# Altium PCB Miner-8Chips.PcbDoc (part 1 of 2)
Units mm, origin at the board's own origin, x right, y up, seen from the top; angles counter-clockwise.
Board outline 80.01 x 98.03 mm, 2 copper layers (Top Layer, Bottom Layer), stack 1.061 mm thick; 329 components, 236 nets, 967 pads, 0 vias.
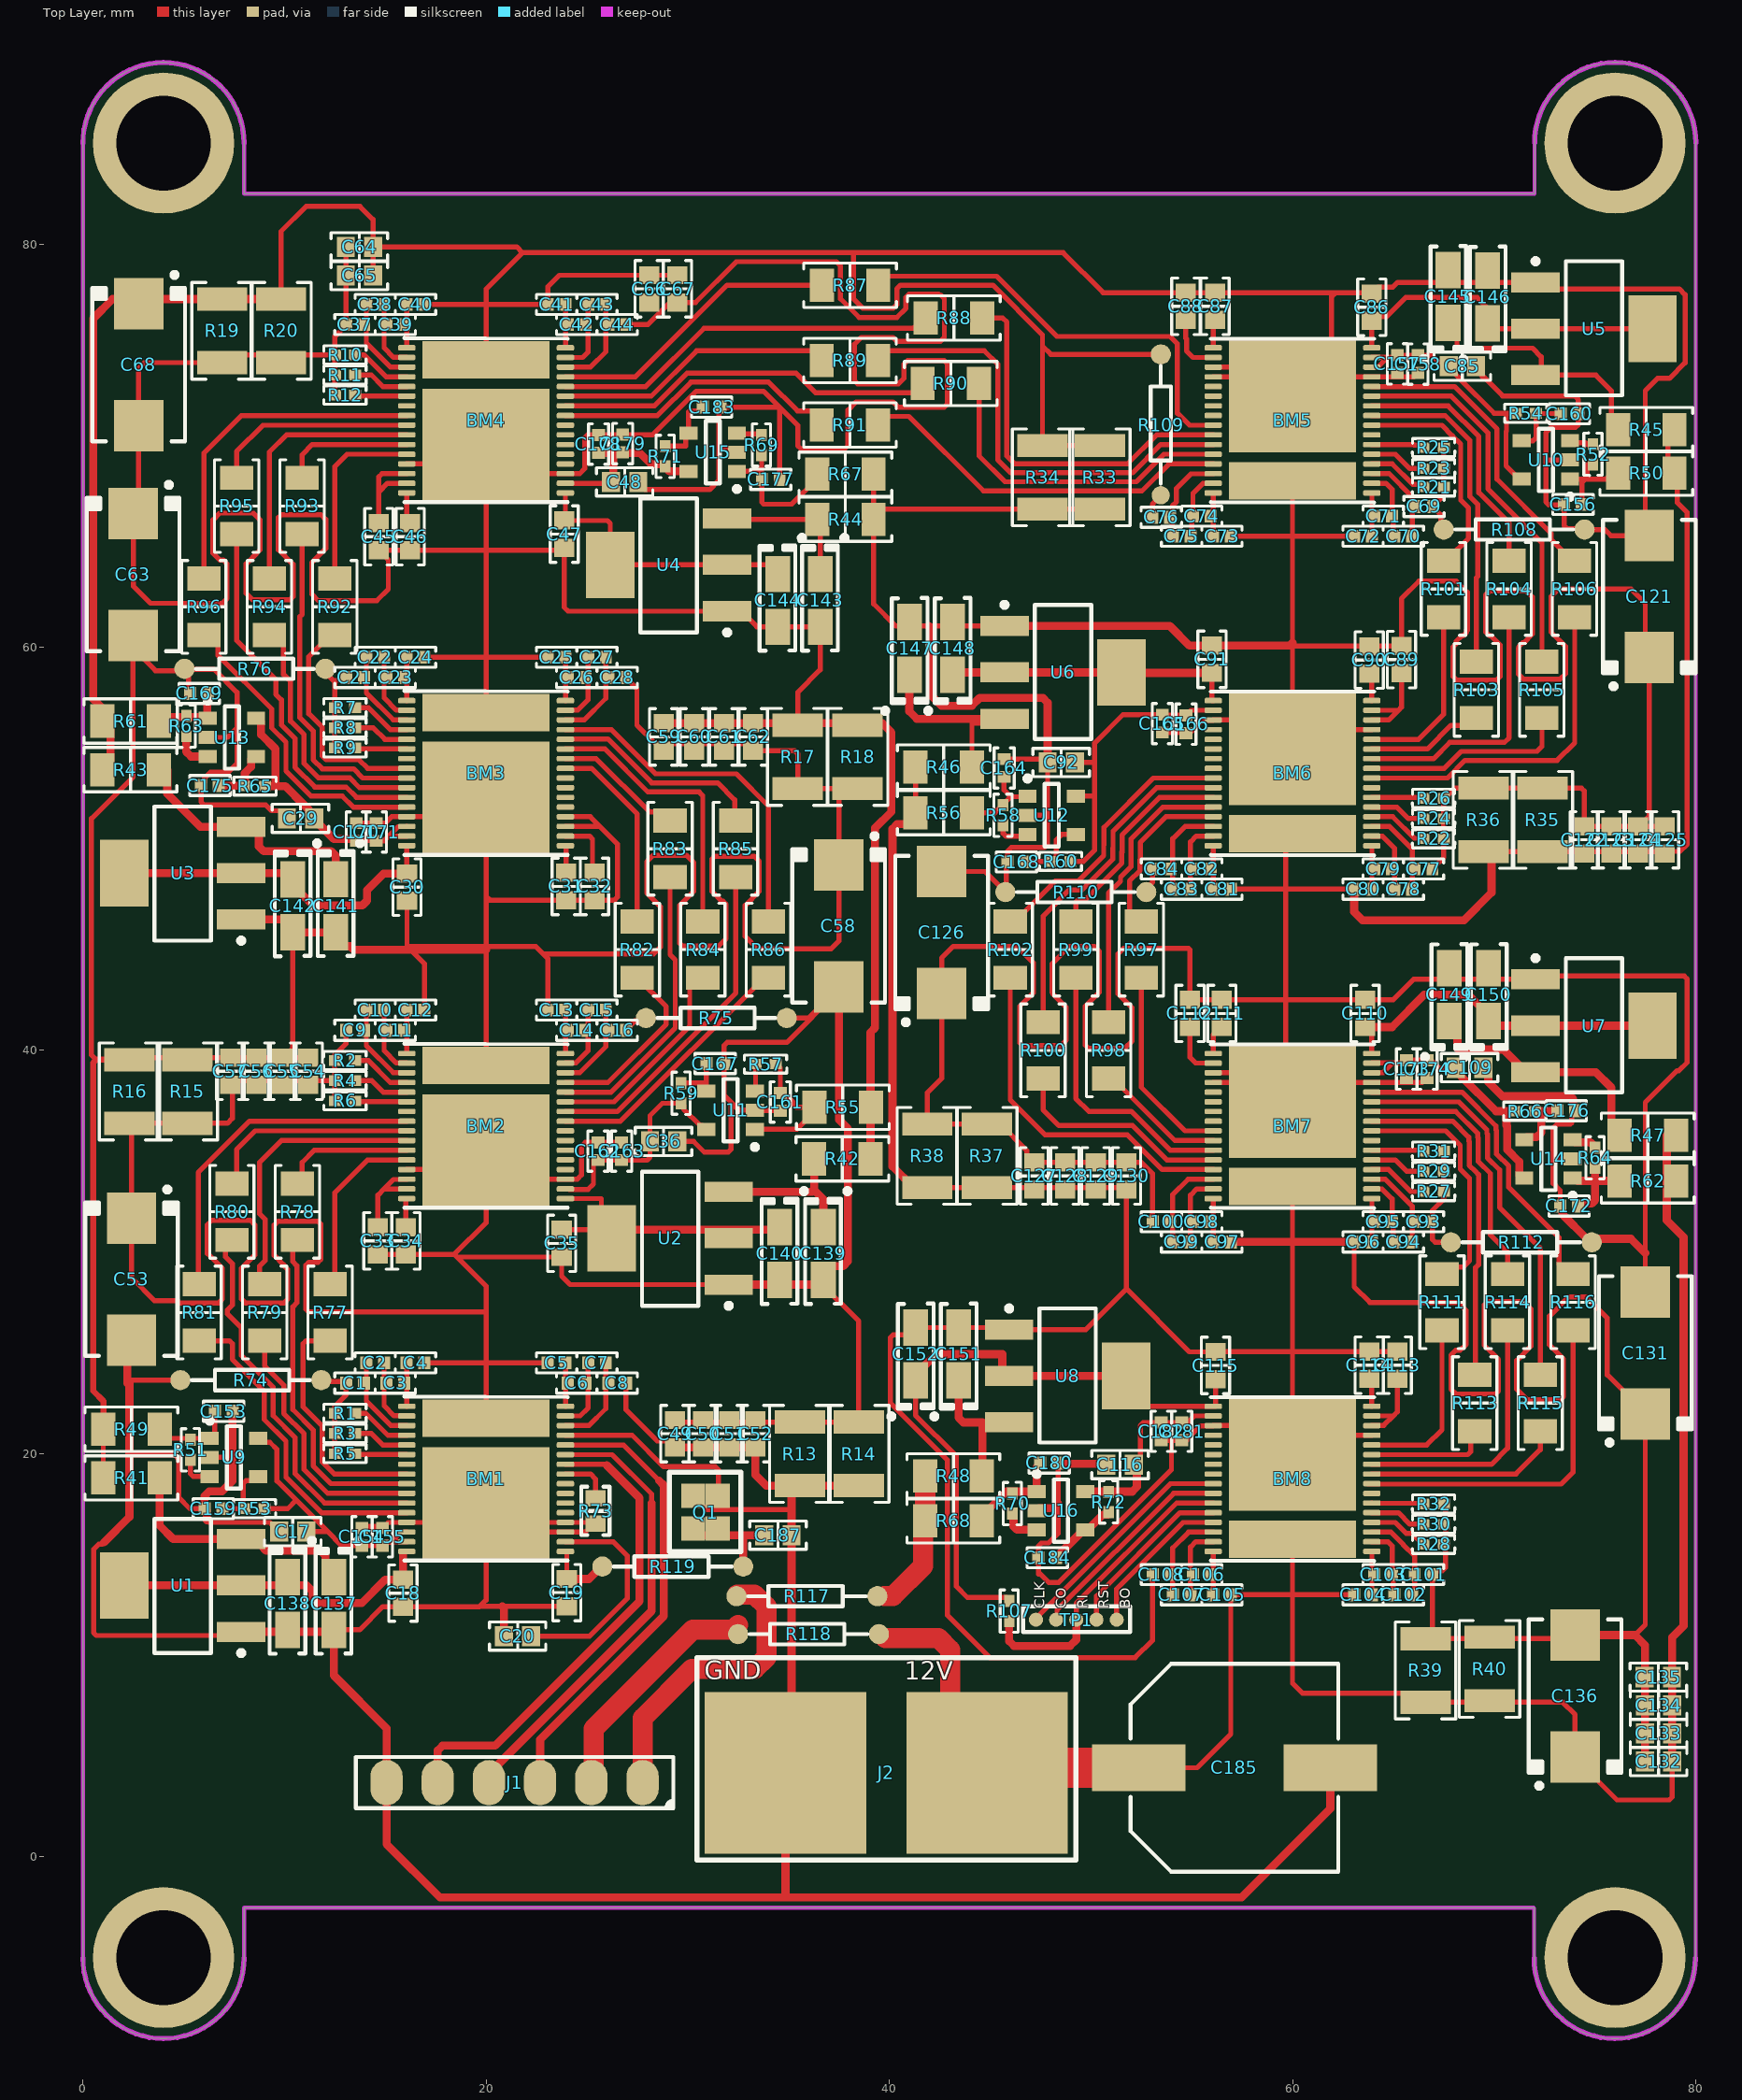
[diagram p0: Top Layer view]
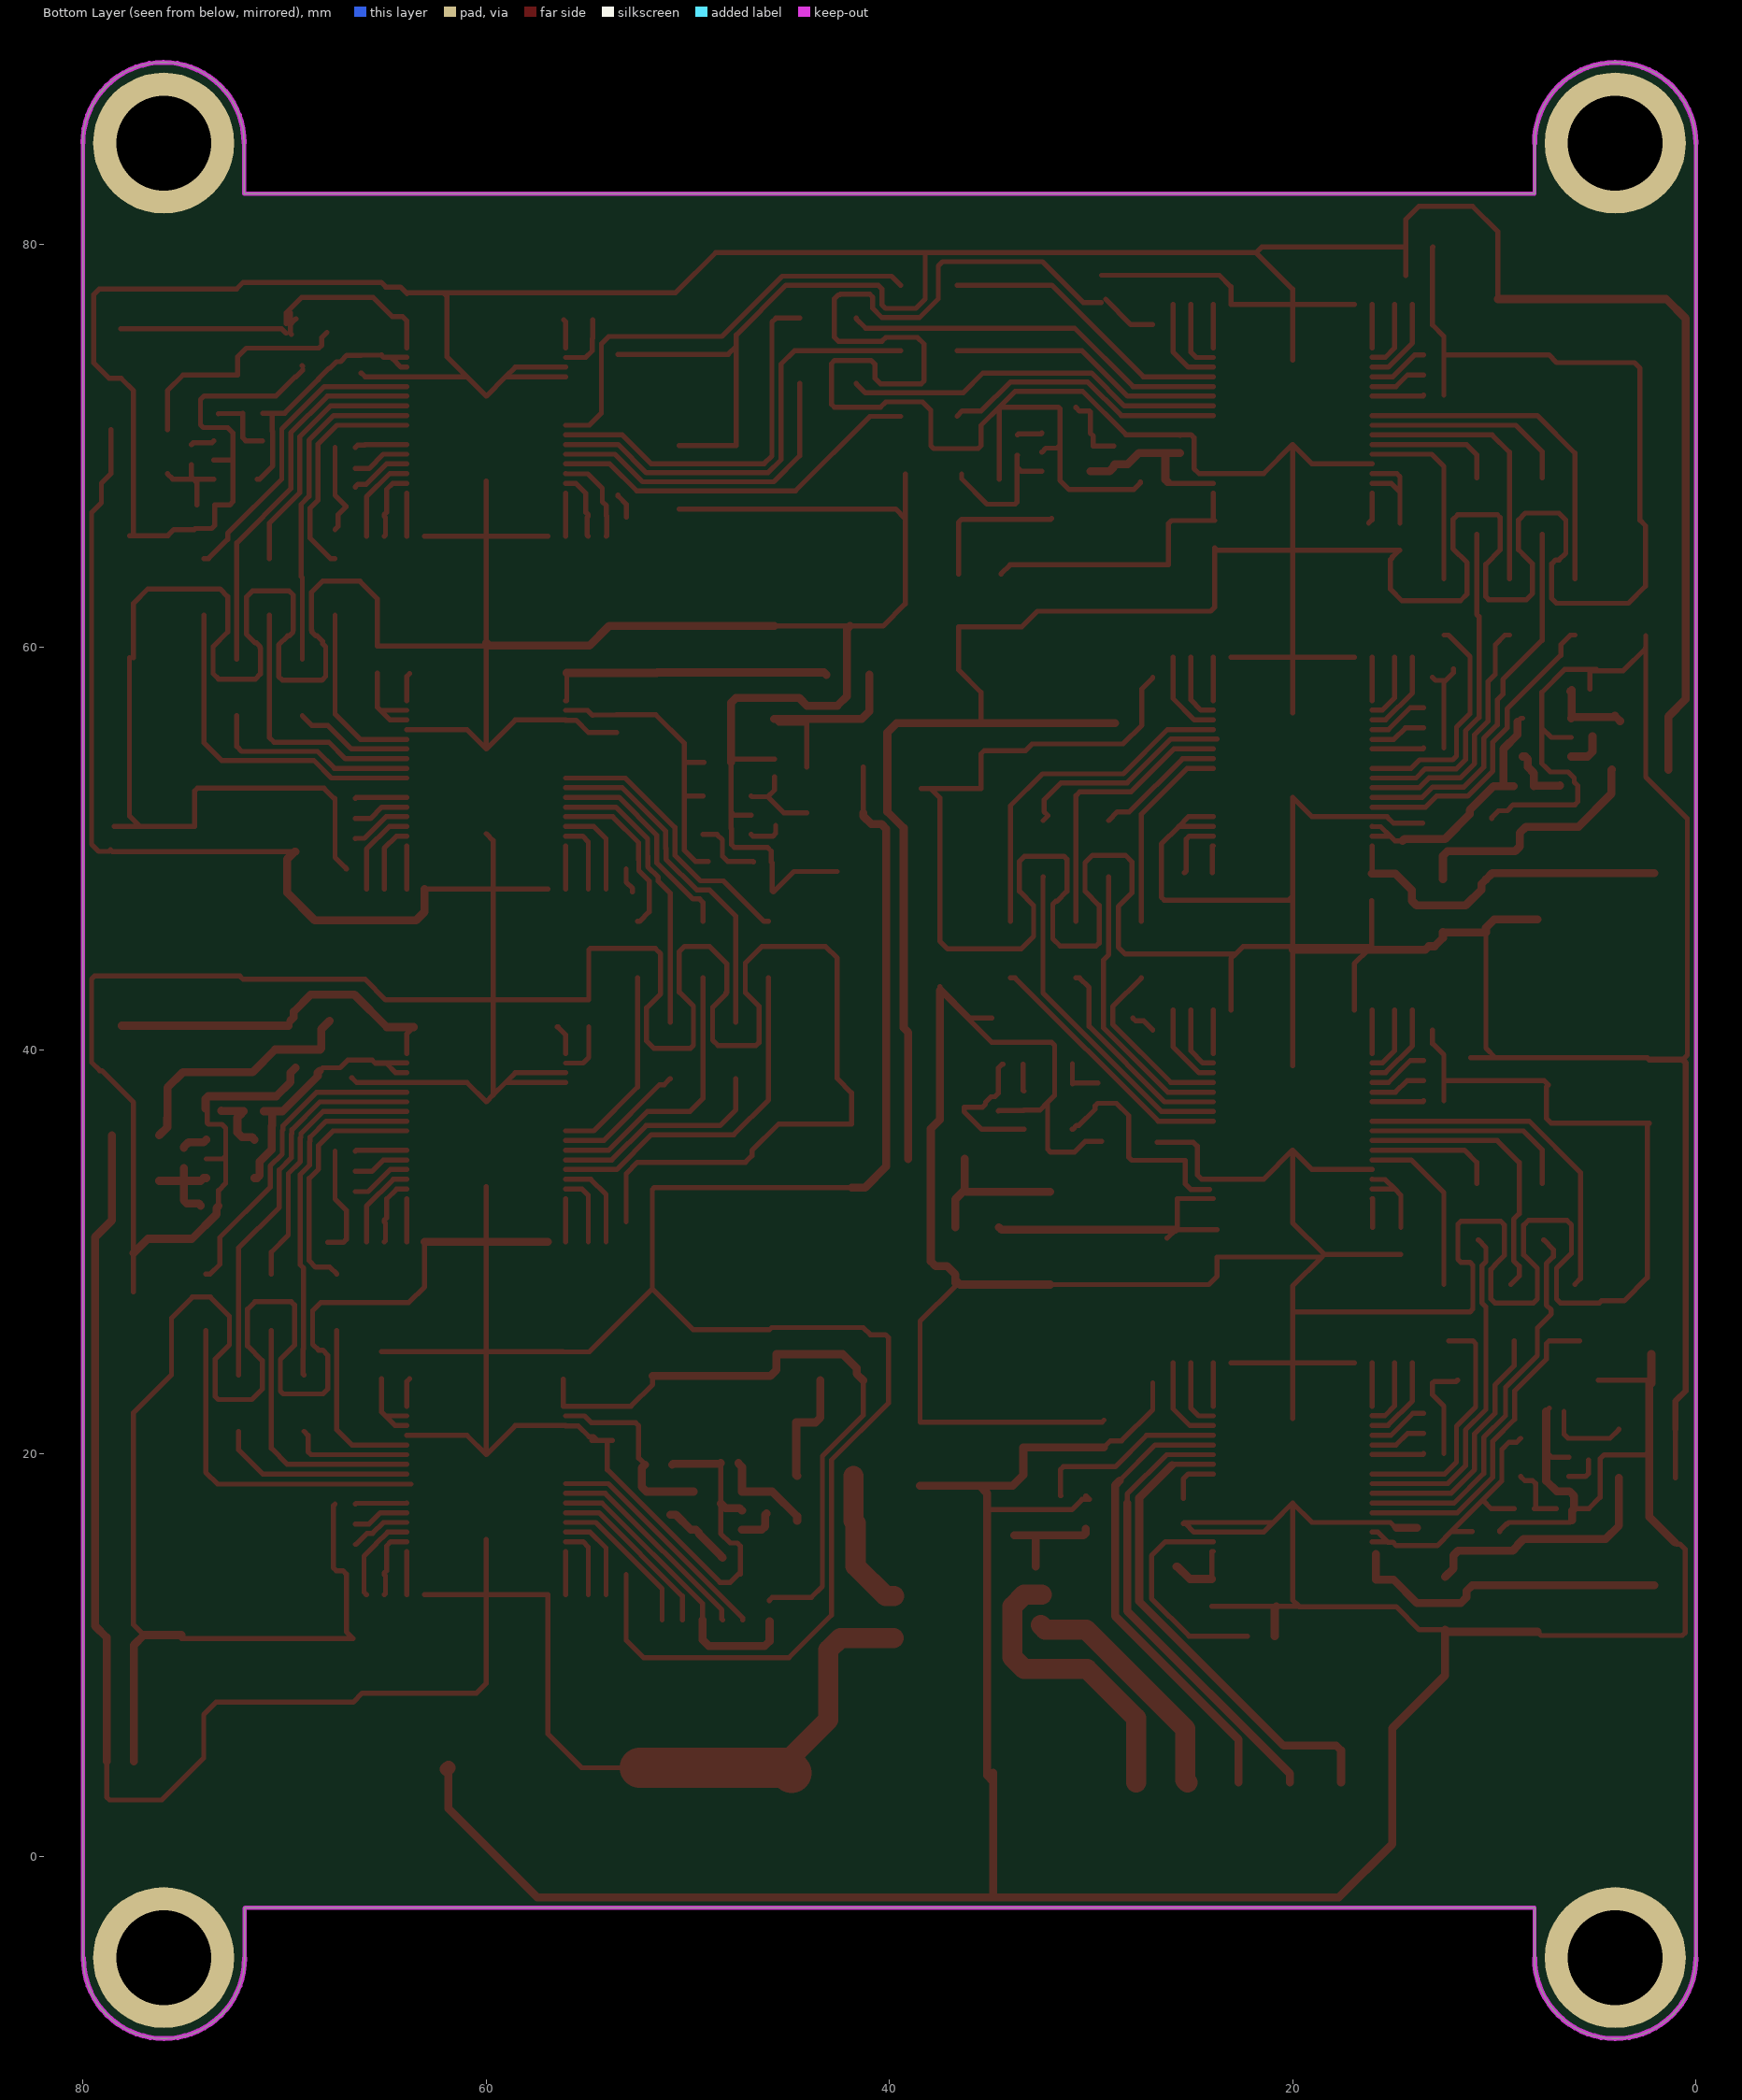
[diagram p1: Bottom Layer view, seen from below]

## Layer stack, top to bottom
Top Solder: solder mask 0.0102, Solder Resist, Dk 3.5
Top Layer: signal copper 0.0356
Dielectric 1: dielectric 0.99, FR-4, Dk 4.8
Bottom Layer: signal copper 0.0356
Bottom Solder: solder mask 0.0102, Solder Resist, Dk 3.5

## Board outline
0,-5 0,85 cw(c4,85) 8,85 8,82.5 72.009,82.5 72.009,85.01 cw(c76.009,85.01) 80.009,85.01 80,85 80,-5 79.985,-5.015 cw(c75.985,-5.015) 71.985,-5.015 71.985,-2.54 71.96,-2.515 8,-2.515 8,-5.015 cw(c4,-5.015)

## Design rules (kind name [scope] priority, off if disabled: settings)
Clearance [All] p1: gap=0.2 ignorepadtopadclearanceinfootprint=FALSE
PolygonConnect [All] p1: connectstyle=Relief reliefconductorwidth=0.254 reliefentries=4 polygonreliefangle="90 Angle" airgapwidth=0.254
RoomDefinition POWER [InComponentClass('POWER')] p1: confinementstyle=ConfineOut formatcopy=TRUE lockcomponents=FALSE outline 136.271,224.155 774.954,224.155 774.954,235.839 136.271,235.839
RoomDefinition BLOCK[5-8] [InComponentClass('BLOCK[5-8]')] p2: confinementstyle=ConfineOut formatcopy=TRUE lockcomponents=FALSE outline 135.255,204.089 735.076,204.089 735.076,216.408 135.255,216.408
RoomDefinition BLOCK[1-4] [InComponentClass('BLOCK[1-4]')] p3: confinementstyle=ConfineOut formatcopy=TRUE lockcomponents=FALSE outline 132.461,186.944 657.606,186.944 657.606,199.263 132.461,199.263
RoutingVias [All] p1: holewidth=0.711 width=1.27 viastyle="Through Hole" minholewidth=0.711 minwidth=1.27 maxholewidth=0.711 maxwidth=1.27
SolderMaskExpansion [All] p1: expansion=0.102 istentingtop=FALSE
Width [All] p1: maxlimit=2 minlimit=0.25 preferedwidth=0.4
30 further rules are at their usual default settings.

## Classes and differential pairs
component class POWER: C137 C138 C139 C140 C141 C142 C143 C144 C145 C146 C147 C148 C149 C150 C151 C152 C153 C154 C155 C156 C157 C158 C159 C160 C161 C162 C163 C164 C165 C166 C167 C168 C169 C170 C171 C172 C173 C174 C175 C176 C177 C178 C179 C180 C181 C182 C183 C184 C185 C187 J1 J2 Q1 R41 R42 R43 R44 R45 R46 R47 R48 R49 R50 R51 R52 R53 R54 R55 R56 R57 R58 R59 R60 R61 R62 R63 R64 R65 R66 R67 R68 R69 R70 R71 R72 R117 R118 R119 U1 U2 U3 U4 U5 U6 U7 U8 U9 U10 U11 U12 U13 U14 U15 U16
component class BLOCK[5-8]: BM5 BM6 BM7 BM8 C69 C70 C71 C72 C73 C74 C75 C76 C77 C78 C79 C80 C81 C82 C83 C84 C85 C86 C87 C88 C89 C90 C91 C92 C93 C94 C95 C96 C97 C98 C99 C100 C101 C102 C103 C104 C105 C106 C107 C108 C109 C110 C111 C112 C113 C114 C115 C116 C121 C122 C123 C124 C125 C126 C127 C128 C129 C130 C131 C132 C133 C134 C135 C136 R21 R22 R23 R24 R25 R26 R27 R28 R29 R30 R31 R32 R33 R34 R35 R36 R37 R38 R39 R40 R97 R98 R99 R100 R101 R102 R103 R104 R105 R106 R107 R108 R109 R110 R111 R112 R113 R114 R115 R116 TP1
component class BLOCK[1-4]: BM1 BM2 BM3 BM4 C1 C2 C3 C4 C5 C6 C7 C8 C9 C10 C11 C12 C13 C14 C15 C16 C17 C18 C19 C20 C21 C22 C23 C24 C25 C26 C27 C28 C29 C30 C31 C32 C33 C34 C35 C36 C37 C38 C39 C40 C41 C42 C43 C44 C45 C46 C47 C48 C49 C50 C51 C52 C53 C54 C55 C56 C57 C58 C59 C60 C61 C62 C63 C64 C65 C66 C67 C68 R1 R2 R3 R4 R5 R6 R7 R8 R9 R10 R11 R12 R13 R14 R15 R16 R17 R18 R19 R20 R73 R74 R75 R76 R77 R78 R79 R80 R81 R82 R83 R84 R85 R86 R87 R88 R89 R90 R91 R92 R93 R94 R95 R96

## Components (designator, comment, footprint, x,y, rotation, side; value= is the part's Value field where it differs from the comment)
BM1 "BM1397" BM1387 20,18.75 r0 top locked
BM2 "BM1397" BM1387 20,36.25 r0 top locked
BM3 "BM1397" BM1387 20,53.75 r0 top locked
BM4 "BM1397" BM1387 20,71.25 r0 top locked
BM5 "BM1397" BM1387 60,71.25 r180 top locked
BM6 "BM1397" BM1387 60,53.75 r180 top locked
BM7 "BM1397" BM1387 60,36.25 r180 top locked
BM8 "BM1397" BM1387 60,18.75 r180 top locked
C1 "1uF" CAP-SMD-0402 13.5,23.5 r0 top locked
C2 "1uF" CAP-SMD-0402 14.5,24.5 r0 top locked
C3 "1uF" CAP-SMD-0402 15.5,23.5 r0 top locked
C4 "1uF" CAP-SMD-0402 16.5,24.5 r0 top locked
C5 "1uF" CAP-SMD-0402 23.5,24.5 r0 top locked
C6 "1uF" CAP-SMD-0402 24.5,23.5 r0 top locked
C7 "1uF" CAP-SMD-0402 25.5,24.5 r0 top locked
C8 "1uF" CAP-SMD-0402 26.5,23.5 r0 top locked
C9 "1uF" CAP-SMD-0402 13.5,41 r0 top locked
C10 "1uF" CAP-SMD-0402 14.5,42 r0 top locked
C11 "1uF" CAP-SMD-0402 15.5,41 r0 top locked
C12 "1uF" CAP-SMD-0402 16.5,42 r0 top locked
C13 "1uF" CAP-SMD-0402 23.5,42 r0 top locked
C14 "1uF" CAP-SMD-0402 24.5,41 r0 top locked
C15 "1uF" CAP-SMD-0402 25.5,42 r0 top locked
C16 "1uF" CAP-SMD-0402 26.5,41 r0 top locked
C17 "100nF" CAP-SMD-0603 10.414,16.129 r0 top
C18 "100nF" CAP-SMD-0603 15.875,13.081 r90 top
C19 "100nF" CAP-SMD-0603 24.003,13.106 r90 top
C20 "100nF" CAP-SMD-0603 21.565,10.947 r0 top
C21 "1uF" CAP-SMD-0402 13.5,58.5 r0 top locked
C22 "1uF" CAP-SMD-0402 14.5,59.5 r0 top locked
C23 "1uF" CAP-SMD-0402 15.5,58.5 r0 top locked
C24 "1uF" CAP-SMD-0402 16.5,59.5 r0 top locked
C25 "1uF" CAP-SMD-0402 23.5,59.5 r0 top locked
C26 "1uF" CAP-SMD-0402 24.5,58.5 r0 top locked
C27 "1uF" CAP-SMD-0402 25.5,59.5 r0 top locked
C28 "1uF" CAP-SMD-0402 26.5,58.5 r0 top locked
C29 "100nF" CAP-SMD-0603 10.795,51.511 r0 top
C30 "100nF" CAP-SMD-0603 16.078,48.097 r90 top
C31 "100nF" CAP-SMD-0603 23.978,48.133 r90 top
C32 "100nF" CAP-SMD-0603 25.375,48.133 r90 top
C33 "100nF" CAP-SMD-0603 14.63,30.556 r90 top
C34 "100nF" CAP-SMD-0603 16.027,30.556 r90 top
C35 "100nF" CAP-SMD-0603 23.749,30.429 r90 top
C36 "100nF" CAP-SMD-0603 28.804,35.484 r180 top
C37 "1uF" CAP-SMD-0402 13.5,76 r0 top locked
C38 "1uF" CAP-SMD-0402 14.5,77 r0 top locked
C39 "1uF" CAP-SMD-0402 15.5,76 r0 top locked
C40 "1uF" CAP-SMD-0402 16.5,77 r0 top locked
C41 "1uF" CAP-SMD-0402 23.5,77 r0 top locked
C42 "1uF" CAP-SMD-0402 24.5,76 r0 top locked
C43 "1uF" CAP-SMD-0402 25.5,77 r0 top locked
C44 "1uF" CAP-SMD-0402 26.5,76 r0 top locked
C45 "100nF" CAP-SMD-0603 14.681,65.481 r90 top
C46 "100nF" CAP-SMD-0603 16.231,65.481 r90 top
C47 "100nF" CAP-SMD-0603 23.876,65.608 r90 top
C48 "100nF" CAP-SMD-0603 26.873,68.199 r180 top
C49 "1uF" CAP-SMD-0603 29.362,20.99 r90 top
C50 "1uF" CAP-SMD-0603 30.759,20.99 r90 top
C51 "100nF" CAP-SMD-0603 32.055,20.99 r90 top
C52 "100nF" CAP-SMD-0603 33.363,20.99 r90 top
C53 "330uF" CAP-TAN-CASE-E 2.413,28.651 r270 top
C54 "1uF" CAP-SMD-0603 11.176,38.964 r90 top
C55 "1uF" CAP-SMD-0603 9.889,38.964 r90 top
C56 "100nF" CAP-SMD-0603 8.602,38.964 r90 top
C57 "100nF" CAP-SMD-0603 7.315,38.964 r90 top
C58 "330uF" CAP-TAN-CASE-E 37.49,46.177 r270 top
C59 "1uF" CAP-SMD-0603 28.804,55.55 r90 top
C60 "1uF" CAP-SMD-0603 30.328,55.55 r90 top
C61 "100nF" CAP-SMD-0603 31.801,55.55 r90 top
C62 "100nF" CAP-SMD-0603 33.249,55.55 r90 top
C63 "330uF" CAP-TAN-CASE-E 2.489,63.602 r270 top
C64 "1uF" CAP-SMD-0603 13.716,79.858 r0 top
C65 "1uF" CAP-SMD-0603 13.716,78.435 r0 top
C66 "100nF" CAP-SMD-0603 28.092,77.775 r90 top
C67 "100nF" CAP-SMD-0603 29.489,77.775 r90 top
C68 "330uF" CAP-TAN-CASE-E 2.769,74.016 r270 top
C69 "1uF" CAP-SMD-0402 66.523,66.98 r180 top
C70 "1uF" CAP-SMD-0402 65.5,65.5 r180 top locked
C71 "1uF" CAP-SMD-0402 64.5,66.5 r180 top locked
C72 "1uF" CAP-SMD-0402 63.5,65.5 r180 top locked
C73 "1uF" CAP-SMD-0402 56.5,65.5 r180 top locked
C74 "1uF" CAP-SMD-0402 55.5,66.5 r180 top locked
C75 "1uF" CAP-SMD-0402 54.5,65.5 r180 top locked
C76 "1uF" CAP-SMD-0402 53.492,66.446 r180 top
C77 "1uF" CAP-SMD-0402 66.5,49 r180 top locked
C78 "1uF" CAP-SMD-0402 65.5,48 r180 top locked
C79 "1uF" CAP-SMD-0402 64.5,49 r180 top locked
C80 "1uF" CAP-SMD-0402 63.5,48 r180 top locked
C81 "1uF" CAP-SMD-0402 56.5,48 r180 top locked
C82 "1uF" CAP-SMD-0402 55.5,49 r180 top locked
C83 "1uF" CAP-SMD-0402 54.5,48 r180 top locked
C84 "1uF" CAP-SMD-0402 53.5,49 r180 top locked
C85 "100nF" CAP-SMD-0603 68.428,73.939 r180 top
C86 "100nF" CAP-SMD-0603 63.932,76.86 r270 top
C87 "100nF" CAP-SMD-0603 56.159,76.911 r270 top
C88 "100nF" CAP-SMD-0603 54.712,76.911 r270 top
C89 "100nF" CAP-SMD-0603 65.405,59.385 r270 top
C90 "100nF" CAP-SMD-0603 63.805,59.36 r270 top
C91 "100nF" CAP-SMD-0603 56.007,59.4 r270 top
C92 "100nF" CAP-SMD-0603 48.529,54.28 r0 top
C93 "1uF" CAP-SMD-0402 66.5,31.5 r180 top locked
C94 "1uF" CAP-SMD-0402 65.5,30.5 r180 top locked
C95 "1uF" CAP-SMD-0402 64.5,31.5 r180 top locked
C96 "1uF" CAP-SMD-0402 63.5,30.5 r180 top locked
C97 "1uF" CAP-SMD-0402 56.5,30.5 r180 top
C98 "1uF" CAP-SMD-0402 55.5,31.5 r180 top
C99 "1uF" CAP-SMD-0402 54.5,30.5 r180 top
C100 "1uF" CAP-SMD-0402 53.5,31.5 r180 top
C101 "1uF" CAP-SMD-0402 66.5,14 r180 top locked
C102 "1uF" CAP-SMD-0402 65.5,13 r180 top locked
C103 "1uF" CAP-SMD-0402 64.5,14 r180 top locked
C104 "1uF" CAP-SMD-0402 63.5,13 r180 top locked
C105 "1uF" CAP-SMD-0402 56.5,13 r180 top locked
C106 "1uF" CAP-SMD-0402 55.5,14 r180 top locked
C107 "1uF" CAP-SMD-0402 54.5,13 r180 top locked
C108 "1uF" CAP-SMD-0402 53.5,14 r180 top locked
C109 "100nF" CAP-SMD-0603 68.783,39.141 r180 top
C110 "100nF" CAP-SMD-0603 63.602,41.834 r270 top
C111 "100nF" CAP-SMD-0603 56.49,41.834 r270 top
C112 "100nF" CAP-SMD-0603 54.915,41.834 r270 top
C113 "100nF" CAP-SMD-0603 65.202,24.384 r270 top
C114 "100nF" CAP-SMD-0603 63.805,24.384 r270 top
C115 "100nF" CAP-SMD-0603 56.185,24.373 r270 top
C116 "100nF" CAP-SMD-0603 51.446,19.456 r0 top
C121 "330uF" CAP-TAN-CASE-E 77.699,62.509 r90 top
C122 "1uF" CAP-SMD-0603 74.473,50.444 r270 top
C123 "1uF" CAP-SMD-0603 75.819,50.444 r270 top
C124 "100nF" CAP-SMD-0603 77.14,50.444 r270 top
C125 "100nF" CAP-SMD-0603 78.461,50.444 r270 top
C126 "330uF" CAP-TAN-CASE-E 42.596,45.847 r90 top
C127 "1uF" CAP-SMD-0603 47.193,33.773 r270 top
C128 "1uF" CAP-SMD-0603 48.717,33.773 r270 top
C129 "100nF" CAP-SMD-0603 50.241,33.773 r270 top
C130 "100nF" CAP-SMD-0603 51.765,33.773 r270 top
C131 "330uF" CAP-TAN-CASE-E 77.5,25 r90 top
C132 "1uF" CAP-SMD-0603 78.156,4.724 r0 top
C133 "1uF" CAP-SMD-0603 78.156,6.121 r0 top
C134 "100nF" CAP-SMD-0603 78.156,7.518 r0 top
C135 "100nF" CAP-SMD-0603 78.145,8.915 r0 top
C136 "330uF" CAP-TAN-CASE-E 74.016,7.976 r90 top
C137 "10uF" CAP-TAN-CASE-A 12.446,12.573 r270 top
C138 "22uF" CAP-TAN-CASE-A 10.16,12.573 r270 top
C139 "10uF" CAP-TAN-CASE-A 36.728,29.921 r270 top
C140 "22uF" CAP-TAN-CASE-A 34.569,29.921 r270 top
C141 "10uF" CAP-TAN-CASE-A 12.548,47.179 r270 top
C142 "22uF" CAP-TAN-CASE-A 10.414,47.168 r270 top
C143 "10uF" CAP-TAN-CASE-A 36.576,62.321 r270 top
C144 "22uF" CAP-TAN-CASE-A 34.468,62.321 r270 top
C145 "10uF" CAP-TAN-CASE-A 67.716,77.394 r90 top
C146 "22uF" CAP-TAN-CASE-A 69.672,77.368 r90 top
C147 "10uF" CAP-TAN-CASE-A 40.996,59.944 r90 top
C148 "22uF" CAP-TAN-CASE-A 43.129,59.944 r90 top
C149 "10uF" CAP-TAN-CASE-A 67.767,42.774 r90 top
C150 "22uF" CAP-TAN-CASE-A 69.723,42.774 r90 top
C151 "10uF" CAP-TAN-CASE-A 43.434,24.943 r90 top
C152 "22uF" CAP-TAN-CASE-A 41.3,24.943 r90 top
C153 "100nF" CAP-SMD-0402 6.985,22.098 r180 top
C154 "100nF" CAP-SMD-0402 13.843,15.875 r270 top
C155 "100nF" CAP-SMD-0402 14.859,15.875 r270 top
C156 "100nF" CAP-SMD-0402 73.914,67.081 r0 top
C157 "100nF" CAP-SMD-0402 65.202,74.049 r90 top
C158 "100nF" CAP-SMD-0402 66.218,74.041 r90 top
C159 "100nF" CAP-SMD-0402 6.477,17.272 r0 top
C160 "100nF" CAP-SMD-0402 73.736,71.577 r180 top
C161 "100nF" CAP-SMD-0402 34.595,37.44 r90 top
C162 "100nF" CAP-SMD-0402 25.552,35.001 r270 top
C163 "100nF" CAP-SMD-0402 26.721,35.001 r270 top
C164 "100nF" CAP-SMD-0402 45.695,54.009 r270 top
C165 "100nF" CAP-SMD-0402 53.543,56.21 r90 top
C166 "100nF" CAP-SMD-0402 54.712,56.185 r90 top
C167 "100nF" CAP-SMD-0402 31.369,39.345 r180 top
C168 "100nF" CAP-SMD-0402 46.304,49.352 r0 top
C169 "100nF" CAP-SMD-0402 5.766,57.709 r0 top
C170 "100nF" CAP-SMD-0402 13.564,50.834 r270 top
C171 "100nF" CAP-SMD-0402 14.554,50.834 r270 top
C172 "100nF" CAP-SMD-0402 73.719,32.283 r0 top
C173 "100nF" CAP-SMD-0402 65.659,39.073 r90 top
C174 "100nF" CAP-SMD-0402 66.675,39.073 r90 top
C175 "100nF" CAP-SMD-0402 6.299,53.137 r0 top
C176 "100nF" CAP-SMD-0402 73.584,37.008 r180 top
C177 "100nF" CAP-SMD-0402 34.12,68.326 r180 top
C178 "100nF" CAP-SMD-0402 25.578,70.079 r270 top
C179 "100nF" CAP-SMD-0402 26.772,70.096 r270 top
C180 "100nF" CAP-SMD-0402 47.93,19.533 r180 top
C181 "100nF" CAP-SMD-0402 54.508,21.107 r90 top
C182 "100nF" CAP-SMD-0402 53.492,21.107 r90 top
C183 "100nF" CAP-SMD-0402 31.191,71.907 r180 top
C184 "100nF" CAP-SMD-0402 47.836,14.834 r0 top
C185 "1000uF/25v" "CAP ALUM 10.3MM" 57.125,4.42 r0 top
C187 "100nF" CAP-SMD-0603 34.479,15.951 r0 top
J1 "HEADER 1x6" HEADER-1X6 21.412,3.683 r180 top
J2 "CONNECTOR" "ATX 6" 39.853,4.166 r0 top
Q1 "25MHz" XTALL 30.886,17.094 r90 top
R1 "0R" RES-SMD-0402 13,22 r0 top locked
R2 "0R" RES-SMD-0402 13,39.5 r0 top locked
R3 "0R" RES-SMD-0402 13,21 r0 top locked
R4 "0R" RES-SMD-0402 13,38.5 r0 top locked
R5 "0R" RES-SMD-0402 13,20 r0 top locked
R6 "0R" RES-SMD-0402 13,37.5 r0 top locked
R7 "0R" RES-SMD-0402 13,57 r0 top locked
R8 "0R" RES-SMD-0402 13,56 r0 top locked
R9 "0R" RES-SMD-0402 13,55 r0 top locked
R10 "0R" RES-SMD-0402 13,74.5 r0 top locked
R11 "0R" RES-SMD-0402 13,73.5 r0 top locked
R12 "0R" RES-SMD-0402 13,72.5 r0 top locked
R13 "10R" RES-SMD-1210 35.56,19.99 r0 top
R14 "10R" RES-SMD-1210 38.481,19.99 r0 top
R15 "10R" RES-SMD-1210 5.182,37.964 r0 top
R16 "10R" RES-SMD-1210 2.311,37.964 r0 top
R17 "10R" RES-SMD-1210 35.458,54.559 r0 top
R18 "10R" RES-SMD-1210 38.43,54.559 r0 top
R19 "10R" RES-SMD-1210 6.909,75.692 r0 top
R20 "10R" RES-SMD-1210 9.83,75.692 r0 top
R21 "0R" RES-SMD-0402 67,67.945 r180 top
R22 "0R" RES-SMD-0402 67,50.5 r180 top locked
R23 "0R" RES-SMD-0402 67,68.859 r180 top
R24 "0R" RES-SMD-0402 67,51.5 r180 top locked
R25 "0R" RES-SMD-0402 67,69.901 r180 top
R26 "0R" RES-SMD-0402 67,52.5 r180 top locked
R27 "0R" RES-SMD-0402 67,33 r180 top locked
R28 "0R" RES-SMD-0402 67,15.5 r180 top
R29 "0R" RES-SMD-0402 67,34 r180 top locked
R30 "0R" RES-SMD-0402 67,16.5 r180 top
R31 "0R" RES-SMD-0402 67,35 r180 top locked
R32 "0R" RES-SMD-0402 67,17.5 r180 top
R33 "10R" RES-SMD-1210 50.444,68.428 r180 top
R34 "10R" RES-SMD-1210 47.6,68.428 r180 top
R35 "10R" RES-SMD-1210 72.39,51.435 r180 top
R36 "10R" RES-SMD-1210 69.469,51.435 r180 top
R37 "10R" RES-SMD-1210 44.831,34.773 r180 top
R38 "10R" RES-SMD-1210 41.885,34.773 r180 top
R39 "10R" RES-SMD-1210 66.599,9.246 r180 top
R40 "10R" RES-SMD-1210 69.774,9.322 r180 top
R41 "4.99R" RES-SMD-1206 2.413,18.796 r0 top
R42 "4.99R" RES-SMD-1206 37.668,34.62 r180 top
R43 "4.99R" RES-SMD-1206 2.362,53.924 r0 top
R44 "4.99R" RES-SMD-1206 37.821,66.345 r180 top
R45 "4.99R" RES-SMD-1206 77.546,70.79 r180 top
R46 "4.99R" RES-SMD-1206 42.697,54.051 r0 top
R47 "4.99R" RES-SMD-1206 77.622,35.789 r180 top
R48 "4.99R" RES-SMD-1206 43.18,18.898 r0 top
R49 "4.99R" RES-SMD-1206 2.413,21.209 r0 top
R50 "4.99R" RES-SMD-1206 77.546,68.631 r180 top
R51 "10K" RES-SMD-0402 5.334,20.193 r270 top
R52 "10K" RES-SMD-0402 74.905,69.571 r90 top
R53 "0R" RES-SMD-0402 8.509,17.272 r0 top
R54 "0R" RES-SMD-0402 71.577,71.603 r180 top
R55 "4.99R" RES-SMD-1206 37.694,37.186 r180 top
R56 "4.99R" RES-SMD-1206 42.697,51.791 r0 top
R57 "10K" RES-SMD-0402 33.866,39.319 r180 top
R58 "10K" RES-SMD-0402 45.644,51.664 r270 top
R59 "0R" RES-SMD-0402 29.667,37.879 r270 top
R60 "0R" RES-SMD-0402 48.489,49.378 r0 top
R61 "4.99R" RES-SMD-1206 2.362,56.337 r0 top
R62 "4.99R" RES-SMD-1206 77.622,33.528 r180 top
R63 "10K" RES-SMD-0402 5.131,56.083 r270 top
R64 "10K" RES-SMD-0402 75.006,34.671 r90 top
R65 "0R" RES-SMD-0402 8.534,53.111 r0 top
R66 "0R" RES-SMD-0402 71.526,36.982 r180 top
R67 "4.99R" RES-SMD-1206 37.821,68.58 r180 top
R68 "4.99R" RES-SMD-1206 43.18,16.662 r0 top
R69 "10K" RES-SMD-0402 33.655,70.028 r90 top
R70 "10K" RES-SMD-0402 46.101,17.526 r270 top
R71 "0R" RES-SMD-0402 28.88,69.469 r270 top
R72 "0R" RES-SMD-0402 50.876,17.602 r90 top
R73 "0R" RES-SMD-0603 25.425,17.16 r270 top
R74 "0R" RES#1 8.331,23.647 r90 top
R75 "0R" RES#1 31.42,41.605 r90 top
R76 "0R" RES#1 8.534,58.928 r90 top
R77 "33R" RES-SMD-1206 12.266,27 r270 top
R78 "33R" RES-SMD-1206 10.641,32 r270 top
R79 "33R" RES-SMD-1206 9.016,27 r270 top
R80 "33R" RES-SMD-1206 7.391,32 r270 top
R81 "33R" RES-SMD-1206 5.766,27 r270 top
R82 "33R" RES-SMD-1206 27.5,45 r90 top
R83 "33R" RES-SMD-1206 29.125,50 r90 top
R84 "33R" RES-SMD-1206 30.75,45 r90 top
R85 "33R" RES-SMD-1206 32.375,50 r90 top
R86 "33R" RES-SMD-1206 34,45 r90 top
R87 "33R" RES-SMD-1206 38.053,77.952 r0 top
R88 "33R" RES-SMD-1206 43.205,76.327 r0 top
R89 "33R" RES-SMD-1206 38.049,74.219 r0 top
R90 "33R" RES-SMD-1206 43.053,73.077 r0 top
R91 "33R" RES-SMD-1206 38.049,71.018 r0 top
R92 "33R" RES-SMD-1206 12.5,62 r270 top
R93 "33R" RES-SMD-1206 10.875,67 r270 top
R94 "33R" RES-SMD-1206 9.25,62 r270 top
R95 "33R" RES-SMD-1206 7.625,67 r270 top
R96 "33R" RES-SMD-1206 6,62 r270 top
R97 "33R" RES-SMD-1206 52.5,45 r270 top
R98 "33R" RES-SMD-1206 50.875,40 r270 top
R99 "33R" RES-SMD-1206 49.25,45 r270 top
R100 "33R" RES-SMD-1206 47.625,40 r270 top
R101 "33R" RES-SMD-1206 67.49,62.887 r90 top
R102 "33R" RES-SMD-1206 46,45 r270 top
R103 "33R" RES-SMD-1206 69.115,57.887 r90 top
R104 "33R" RES-SMD-1206 70.74,62.887 r90 top
R105 "33R" RES-SMD-1206 72.365,57.887 r90 top
R106 "33R" RES-SMD-1206 73.99,62.887 r90 top
R107 "4.7K" RES-SMD-0402 45.949,12.192 r270 top
R108 "0R" RES#1 70.993,65.837 r270 top
R109 "0R" RES#2 53.467,71.031 r180 top
R110 "0R" RES#1 49.251,47.854 r270 top
R111 "33R" RES-SMD-1206 67.414,27.508 r90 top
R112 "0R" RES#1 71.349,30.48 r270 top
R113 "33R" RES-SMD-1206 69.039,22.508 r90 top
R114 "33R" RES-SMD-1206 70.664,27.508 r90 top
R115 "33R" RES-SMD-1206 72.289,22.508 r90 top
R116 "33R" RES-SMD-1206 73.914,27.508 r90 top
R117 "0R" RES#1 35.916,12.929 r270 top
R118 "0R" RES#1 35.992,11.049 r270 top
R119 "0R" RES#1 29.261,14.402 r270 top
TP1 "TEST POINT" TEST_POINT 49.276,11.76 r0 top
U1 "AMS1117" AMS1117 4.953,13.462 r90 top
U2 "AMS1117" AMS1117 29.134,30.683 r90 top
U3 "AMS1117" AMS1117 4.953,48.793 r90 top
U4 "AMS1117" AMS1117 29.058,64.084 r90 top
U5 "AMS1117" AMS1117 74.955,75.794 r270 top
U6 "AMS1117" AMS1117 48.616,58.75 r270 top
U7 "AMS1117" AMS1117 74.955,41.224 r270 top
U8 "AMS1117" AMS1117 48.844,23.851 r270 top
U9 "SGM2036" SOT23-5PIN 7.493,19.812 r0 top
U10 "SGM2036" SOT23-5PIN 72.568,69.291 r180 top
U11 "SGM2036" SOT23-5PIN 32.131,37.033 r180 top
U12 "SGM2036" SOT23-5PIN 48.057,51.664 r0 top
U13 "SGM2036" SOT23-5PIN 7.391,55.524 r0 top
U14 "SGM2036" SOT23-5PIN 72.695,34.62 r180 top
U15 "SGM2036" SOT23-5PIN 31.242,69.672 r180 top
U16 "SGM2036" SOT23-5PIN 48.514,17.17 r0 top

## Footprints (in the part's own frame and the unit in brackets; to place one, negate y for a bottom-side part, rotate by r counter-clockwise, add the part's x,y. Pads: shape width x height; smd on the part's side, far side on the other; paste and mask are expansions set on the pad)
AMS1117 [mm]
  rect 1x2.4 smd: 1(-2.3,-2.9) 2(0,-2.9) 3(2.3,-2.9)
  rect 3.3x2.4 smd: 4(0,2.9)
  silkscreen extent -3.47,-3.03 3.3,1.4, body extent -3.24,-3.49 3.24,3.49, height 1.64
"ATX 6" [mm]
  rect 8x8 smd: 1(-5,0) 2(5,0)
  silkscreen extent -9.4,-4.32 9.4,5.71
BM1387 [mm]
  rrect50% 0.86x0.27 smd: 1(-3.935,3.6) 2(-3.935,3.12) 3(-3.935,2.64) 4(-3.935,2.16) 5(-3.935,1.68) 6(-3.935,1.2) 7(-3.935,0.72) 8(-3.935,0.24) 9(-3.935,-0.24) 10(-3.935,-0.72) 11(-3.935,-1.2) 12(-3.935,-1.68) 13(-3.935,-2.16) 14(-3.935,-2.64) 15(-3.935,-3.12) 16(-3.935,-3.6) 17(3.935,-3.6) 18(3.935,-3.12) 19(3.935,-2.64) 20(3.935,-2.16) 21(3.935,-1.68) 22(3.935,-1.2) 23(3.935,-0.72) 24(3.935,-0.24) 25(3.935,0.24) 26(3.935,0.72) 27(3.935,1.2) 28(3.935,1.68) 29(3.935,2.16) 30(3.935,2.64) 31(3.935,3.12) 32(3.935,3.6)
  rect 6.3x5.55 smd: 33(0,-1.2)
  rect 6.3x1.85 smd: 34(0,3)
  silkscreen extent -4.05,-4.05 4.05,4.08, body extent -4.06,-4.11 4.09,4.14, height 0.2
"CAP ALUM 10.3MM" [mm] "Aluminum Electrolytic Capacitor, Body 10.30x10.30x10.50mm, IPC Low Density"
  rect 4.65x2.3 smd: 1(-4.75,0) 2(4.75,0)
  silkscreen extent -5.15,-5.15 5.15,5.15, body extent -5.8,-5.15 5.8,5.15, height 10.5
CAP-SMD-0402 [mm]
  rect 0.6x0.64 smd: 1(-0.44,0) 2(0.44,0)
  silkscreen extent -1,-0.5 1,0.5, body extent -0.5,-0.26 0.5,0.26, height 0.52
CAP-SMD-0603 [mm]
  rect 0.9x1 smd: 1(-0.675,0) 2(0.675,0)
  silkscreen extent -1.4,-0.7 1.4,0.7, body extent -0.8,-0.41 0.8,0.41, height 0.82
CAP-TAN-CASE-A [mm]
  rect 1.8x1.23 smd: 1(-1.31,0) 2(1.31,0)
  silkscreen extent -3.22,-0.9 2.5,1.33, body extent -1.72,-0.85 1.71,0.85, height 1.7
CAP-TAN-CASE-E [mm]
  rect 2.55x2.45 smd: 1(-3.025,0) 2(3.025,0)
  silkscreen extent -4.57,-2.3 3.8,2.3, body extent -3.81,-2.3 3.79,2.3, height 2
HEADER-1X6 [mm]
  oval 1.6x2.25 smd: 1(-6.35,0) 2(-3.81,0) 3(-1.27,0) 4(1.27,0) 5(3.81,0) 6(6.35,0)
  silkscreen extent -7.88,-1.27 7.88,1.27, body extent -8.05,-1.21 8.05,10.29, height 1.2
RES#1 [mm]
  round 1 smd: 1(0,3.492) 2(0,-3.492)
  silkscreen extent -0.51,-2.92 0.51,2.92
RES#2 [mm]
  round 0.9 smd: 1(0,3.492)
  round 1 smd: 2(0,-3.492)
  silkscreen extent -0.51,-2.92 0.51,2.92
RES-SMD-0402 [mm]
  rect 0.6x0.52 smd: 1(-0.5,0) 2(0.5,0)
  silkscreen extent -1.05,-0.45 1.05,0.45, body extent -0.52,-0.25 0.48,0.25, height 0.35
RES-SMD-0603 [mm]
  rect 0.8x1 smd: 1(-0.625,0) 2(0.625,0)
  silkscreen extent -1.2,-0.7 1.2,0.7, body extent -0.8,-0.41 0.8,0.41, height 0.82
RES-SMD-1206 [mm]
  rect 1.2x1.65 smd: 1(-1.4,0) 2(1.4,0)
  silkscreen extent -2.3,-1.1 2.3,1.1, body extent -1.57,-0.8 1.63,0.8, height 0.6
RES-SMD-1210 [mm]
  rect 2.5x1.15 smd: 1(0,-1.575) 2(0,1.575)
  silkscreen extent -1.5,-2.4 1.5,2.4, body extent -1.25,-1.6 1.25,1.6, height 0.7
SOT23-5PIN [mm]
  rect 0.9x0.65 smd: 1(-1.2,0.95) 2(-1.2,0) 3(-1.2,-0.95) 4(1.2,-0.95) 5(1.2,0.95)
  silkscreen extent -1.32,-1.55 0.35,1.95, body extent -0.9,-1.55 0.9,1.55, height 1.45
TEST_POINT [mm]
  round 0.7 smd: 1(2,0) 2(1,0) 3(0,0) 4(-1,0) 5(-2,0)
  silkscreen extent -2.64,-0.61 2.67,0.66
XTALL [mm]
  rect 1.2x1.2 smd: 1(-0.813,0.613) 2(0.813,0.613) 3(0.813,-0.612) 4(-0.813,-0.612)
  silkscreen extent -1.96,-1.76 1.98,1.8, body extent -1.6,-1.27 1.6,1.23, height 0.87

## Part data
BM1 BM3 BM5 BM7: library part BM1397_0
BM2 BM4 BM6 BM8: library part BM1397_1
C1 C2 C3 C4 C5 C6 C7 C8 C9 C10 C11 C12 C13 C14 C15 C16 C17 C18 C19 C20 C21 C22 C23 C24 C25 C26 C27 C28 C29 C30 C31 C32 C33 C34 C35 C36 C37 C38 C39 C40 C41 C42 C43 C44 C45 C46 C47 C48 C49 C50 C51 C52 C54 C55 C56 C57 C59 C60 C61 C62 C64 C65 C66 C67 C69 C70 C71 C72 C73 C74 C75 C76 C77 C78 C79 C80 C81 C82 C83 C84 C85 C86 C87 C88 C89 C90 C91 C92 C93 C94 C95 C96 C97 C98 C99 C100 C101 C102 C103 C104 C105 C106 C107 C108 C109 C110 C111 C112 C113 C114 C115 C116 C122 C123 C124 C125 C127 C128 C129 C130 C132 C133 C134 C135 C153 C154 C155 C156 C157 C158 C159 C160 C161 C162 C163 C164 C165 C166 C167 C168 C169 C170 C171 C172 C173 C174 C175 C176 C177 C178 C179 C180 C181 C182 C183 C184 C187: library part CAP
C53 C58 C63 C68 C121 C126 C131 C136 C137 C138 C139 C140 C141 C142 C143 C144 C145 C146 C147 C148 C149 C150 C151 C152 C185: library part "POLARIZED CAP"
J2: library part "ATX 6"
Q1: library part OSCILLATOR
R1 R2 R3 R4 R5 R6 R7 R8 R9 R10 R11 R12 R13 R14 R15 R16 R17 R18 R19 R20 R21 R22 R23 R24 R25 R26 R27 R28 R29 R30 R31 R32 R33 R34 R35 R36 R37 R38 R39 R40 R41 R42 R43 R44 R45 R46 R47 R48 R49 R50 R51 R52 R53 R54 R55 R56 R57 R58 R59 R60 R61 R62 R63 R64 R65 R66 R67 R68 R69 R70 R71 R72 R73 R74 R75 R76 R77 R78 R79 R80 R81 R82 R83 R84 R85 R86 R87 R88 R89 R90 R91 R92 R93 R94 R95 R96 R97 R98 R99 R100 R101 R102 R103 R104 R105 R106 R107 R108 R109 R110 R111 R112 R113 R114 R115 R116 R117 R118 R119: library part RES

## Free pads (board coordinates)
  round 7 hole 4.7: 0(4,-5) 0(4,85) 0(76,-5) 0(76,85)

## Nets (pads, with @x,y where several pads share a name; then routed paths per layer and width w, separated by ;. In a path a pad name is that pad's centre, name@x,y a point inside that pad or via, vN(x,y) a via of type N, cw(c..) or ccw(c..) an arc to the next point about the centre after c; other vN are vias at no path point)
0.8V-1: BM1.14 BM1.15 C17.2 C154.2 C155.2 R53.2 U9.5 | length 14.3
  Top Layer w0.25: U9.5@8.693,20.762 8.893,20.562 9.275,20.562 9.625,20.212 9.625,18.645 10.579,17.691 ; R53.2@9.009,17.272 10.16,17.272 10.579,17.691 ; C17.2@11.089,16.129 12.065,16.129 12.103,16.167 ; BM1.15@16.065,15.63 16.055,15.62 15.28,15.62 ; BM1.14@16.065,16.11 15.77,16.11 15.28,15.62 ; 10.579,17.691 12.103,16.167 ; 12.103,16.167 12.835,15.435 C154.2@13.843,15.435 C155.2@14.859,15.435 15.034,15.61 15.27,15.61 15.28,15.62
0.8V-2: BM2.18 C36.2 C162.2 C163.2 R59.2 U11.5 | length 11.1
  Top Layer w0.25: BM2.18@24.13,33.11 25.058,33.11 25.324,33.376 25.324,34.553 26.543,34.553 27.982,34.553 28.129,34.699 C36.2@28.129,35.484 28.129,36.765 28.743,37.379 R59.2@29.667,37.379 29.802,37.244 29.802,37.087 30.606,36.283 30.709,36.283 30.909,36.083 U11.5@30.931,36.083
0.8V-3: BM3.14 BM3.15 C29.2 C170.2 C171.2 R65.2 U13.5 | length 13.3
  Top Layer w0.25: U13.5@8.591,56.474 8.666,56.474 U13.5@8.841,56.299 ; C171.2@14.554,50.394 14.935,50.394 15.172,50.63 ; BM3.15@16.065,50.63 15.172,50.63 ; BM3.14@16.065,51.11 16.055,51.1 15.642,51.1 15.172,50.63
  Top Layer w0.4: U13.5@8.841,56.299 8.841,55.665 9.55,54.956 9.55,53.111 ; R65.2@9.034,53.111 9.55,53.111 ; C171.2@14.554,50.394 14.462,50.486 12.446,50.486 11.22,51.711 11.22,51.927 10.97,52.177 10.035,53.111 9.55,53.111
0.8V-4: BM4.18 C48.2 C178.2 C179.2 R71.2 U15.5 | length 8.7
  Top Layer w0.25: BM4.18@23.935,68.13 26.129,68.13 C48.2@26.198,68.199
  Top Layer w0.4: C178.2@25.578,69.639 26.314,69.639 ; C48.2@26.198,68.199 26.314,68.315 26.314,69.639 ; U15.5@30.042,68.722 29.087,68.722 28.88,68.929 R71.2@28.88,68.969 28.88,69.009 28.82,69.069 28.194,69.069 27.624,69.639 26.314,69.639
0.8V-5: BM5.14 BM5.15 C85.2 C157.2 C158.2 R54.2 U10.5 | length 13
  Top Layer w0.25: BM5.14@63.935,73.89 64.23,73.89 64.654,74.314 ; BM5.15@63.935,74.37 63.945,74.38 64.654,74.38 65.093,74.38 C157.2@65.202,74.489 65.206,74.485 66.214,74.485 C158.2@66.218,74.481 66.913,74.481 67.232,74.162 67.428,74.162 67.753,73.837 67.805,73.837 68.328,73.314 68.328,73.275 70,71.603 70.616,71.603 ; R54.2@71.077,71.603 70.616,71.603 ; U10.5@71.368,68.341 71.243,68.341 70.593,68.991 70.593,70.701 70.616,70.724 70.616,71.603
0.8V-6: BM6.18 C92.2 C165.2 C166.2 R60.2 U12.5 | length 15.3
  Top Layer w0.25: R60.2@48.989,49.378 49.632,49.378 50.185,49.931 50.185,52.527 ; C92.2@49.204,54.28 50.185,54.28 ; U12.5@49.257,52.614 50.099,52.614 50.185,52.527 ; BM6.18@56.065,56.87 54.977,56.87 54.732,56.625 C166.2@54.712,56.625 54.699,56.638 53.556,56.638 C165.2@53.543,56.65 51.596,56.65 50.185,55.24 50.185,54.28 ; 50.185,52.527 50.185,54.28
0.8V-7: BM7.14 BM7.15 C109.2 C173.2 C174.2 R66.2 U14.5 | length 13.8
  Top Layer w0.25: BM7.14@63.935,38.89 63.945,38.9 64.503,38.9 64.964,39.361 C173.2@65.506,39.361 ; BM7.15@63.935,39.37 63.945,39.38 65.487,39.38 C173.2@65.506,39.361 ; C109.2@68.255,38.995 C109.2@68.108,39.141 67.247,39.141 66.875,39.513 C174.2@66.675,39.513 C173.2@65.659,39.513 C173.2@65.506,39.361
  Top Layer w0.4: C109.2@68.255,38.995 68.358,38.891 68.358,38.726 70.102,36.982 70.617,36.982 ; R66.2@71.026,36.982 70.617,36.982 ; U14.5@71.495,33.67 71.37,33.67 71.245,33.795 71.245,34.48 70.645,35.08 70.645,36.252 70.617,36.28 70.617,36.982
0.8V-8: BM8.18 C116.2 C181.2 C182.2 R72.2 U16.5 | length 10.5
  Top Layer w0.25: C116.2@52.121,19.456 52.446,19.781 52.446,21.388 52.592,21.534 53.746,21.534 54.505,21.534 C181.2@54.508,21.53 ; C182.2@53.746,21.53 C181.2@54.508,21.53 ; BM8.18@56.065,21.87 55.122,21.87 54.782,21.53 C181.2@54.508,21.53
  Top Layer w0.4: U16.5@49.714,18.12 50.876,18.12 52.049,18.12 52.283,18.355 52.283,19.294 C116.2@52.121,19.456
1.8V-1: BM1.16 C18.2 C138.1 U1.2 U1.4 | length 16.1
  Top Layer w0.4: U1.4@2.053,13.462 U1.2@7.853,13.462 11.1,13.462 11.383,13.179 11.383,12.866 11.665,12.583 13.828,12.583 15.001,13.756 C18.2@15.875,13.756 15.875,15.011
1.8V-1_2: BM1.17 C19.2 R119.2 | length 3.5
  Top Layer w0.25: BM1.17@23.935,15.15 23.993,15.15 24.003,15.14 C19.2@24.003,13.781
  Top Layer w0.4: C19.2@24.003,13.781 25.103,13.781 25.723,14.402 R119.2@25.768,14.402
1.8V-2: BM2.17 C35.2 C140.1 U2.2 U2.4 | length 14.8
  Top Layer w0.25: C35.2@23.749,31.104 U2.4@25.813,31.104 ; BM2.17@23.935,32.65 25.719,32.65 25.719,31.198 U2.4@25.813,31.104 ; U2.4@26.234,30.683 U2.4@25.813,31.104
  Top Layer w0.4: U2.4@25.813,31.104 34.442,31.104 C140.1@34.569,31.231
1.8V-3: BM3.16 C30.2 C142.1 U3.2 U3.4 | length 17.2
  Top Layer w0.25: BM3.16@16.065,50.15 16.065,48.785 C30.2@16.078,48.772
  Top Layer w0.4: U3.4@2.053,48.793 U3.2@7.853,48.793 10.098,48.793 C142.1@10.414,48.478 10.643,48.249 10.643,47.964 11.418,47.189 13.858,47.189 14.092,47.423 14.092,47.951 14.914,48.772 C30.2@16.078,48.772
1.8V-4: BM4.17 C47.2 C144.1 U4.2 U4.4 | length 14.3
  Top Layer w0.25: BM4.17@23.935,67.65 23.935,66.342 C47.2@23.876,66.283 26.011,66.283 26.158,66.137 U4.4@26.158,64.084 U4.2@31.958,64.084 34.014,64.084 C144.1@34.468,63.631
1.8V-5: BM5.16 C86.2 C146.1 U5.2 U5.4 | length 18.9
  Top Layer w0.25: BM5.16@63.935,74.85 63.935,76.183 C86.2@63.932,76.185 64.142,76.395 64.66,76.395 65.608,77.343 69.164,77.343 69.926,76.581 C146.1@69.926,76.058 ; C146.1@69.444,76.287 C146.1@69.672,76.058 ; C146.1@69.672,75.525 69.723,75.576 69.723,76.581 C146.1@69.723,76.058 ; C146.1@69.926,75.576 70.144,75.794 72.335,75.794 U5.4@78.135,75.794
1.8V-6: BM6.17 C91.2 C148.1 U6.2 U6.4 | length 14.4
  Top Layer w0.25: C91.2@56.007,58.725 56.007,57.36 56.017,57.35 BM6.17@56.065,57.35
  Top Layer w0.4: C148.1@43.129,58.634 43.245,58.75 U6.2@45.716,58.75 U6.4@51.516,58.75 51.541,58.725 C91.2@56.007,58.725
1.8V-7: BM7.16 C110.2 C150.1 U7.2 U7.4 | length 17.2
  Top Layer w0.25: C110.2@63.602,41.159 63.61,41.159 63.935,40.834 BM7.16@63.935,39.85
  Top Layer w0.4: C110.2@63.61,41.159 64.933,41.159 66.538,42.764 68.708,42.764 69.545,41.926 69.545,41.641 C150.1@69.723,41.464 ; C150.1@69.814,41.224 72.284,41.224 U7.4@78.084,41.224
1.8V-8: BM8.17 C115.2 C152.1 R107.1 U8.2 U8.4 | length 32.7
  Top Layer w0.25: C152.1@41.3,23.633 41.3,21.898 43.325,19.873 43.325,13.418 43.877,12.867 45.814,12.867 45.949,12.732 R107.1@45.949,12.692 ; U8.4@51.744,23.851 51.744,23.425 52.819,22.35 BM8.17@56.065,22.35 56.175,22.35 56.185,22.36 C115.2@56.185,23.698
  Top Layer w0.4: C152.1@41.3,23.633 41.631,23.963 41.631,24.248 42.315,24.933 45.603,24.933 45.603,24.151 45.903,23.851 U8.2@45.944,23.851 U8.4@51.744,23.851
3.3V-1: BM2.34 BM3.13 BM3.19 BM3.20 BM3.33 C12.2 C13.1 C28.2 C29.1 C30.1 C31.1 C32.1 C54.2 C55.2 C56.2 C57.2 C58.1 C59.1 C60.1 C61.1 C62.1 C63.2 C141.2 C142.2 C169.1 C170.1 C171.1 C175.1 R15.2 R16.2 R17.1 R18.1 R41.1 R49.1 R76.1 U3.1 U13.2 | length 202.4
  Top Layer w0.25: 0.654,39.539 0.425,39.768 0.425,51.502 2.489,53.567 C63.2@2.489,60.577 ; R41.1@1.013,18.796 R49.1@1.013,21.209 ; R16.2@2.311,39.539 2.411,39.639 C57.2@7.315,39.639 C56.2@8.602,39.639 C55.2@9.889,39.639 C55.2@9.939,39.639 ; C63.2@2.5,59.975 2.5,59.936 3.6,58.836 3.6,58.825 5.166,58.825 5.25,58.742 C169.1@5.25,57.912 ; R76.1@4.938,58.901 6.504,58.901 7.645,57.76 7.645,55.999 ; U13.2@6.191,55.524 7.171,55.524 7.645,55.999 ; C29.1@10.12,51.511 10.12,51.561 9.795,51.886 9.353,51.886 9.06,52.18 6.006,52.18 5.859,52.326 C175.1@5.859,53.137 6.034,53.312 6.034,53.511 6.336,53.813 7.22,53.813 7.424,54.016 7.645,54.238 7.645,55.999 ; C142.2@10.414,45.858 10.414,40.114 C55.2@9.939,39.639 ; C54.2@11.176,39.639 C55.2@9.939,39.639 ; C170.1@13.564,51.274 C171.1@14.554,51.274 15.002,51.274 15.319,51.59 BM3.13@16.065,51.59 19.04,51.59 BM3.33@20,52.55 20,47.65 ; C30.1@16.078,47.422 16.078,45.161 20,45.161 ; 16.239,45 16.94,44.299 C12.2@16.94,42 ; BM2.34@20,39.25 20,45 20,45.161 ; C13.1@23.06,42 23.06,44.555 22.835,44.78 ; BM3.19@23.935,51.11 25.649,51.11 ; BM3.20@23.935,51.59 25.169,51.59 25.649,51.11 ; C28.2@26.94,58.5 26.94,58.48 27.483,57.937 27.483,56.136 28.419,55.2 32.924,55.2 C62.1@33.249,54.875 35.295,54.875 35.458,54.712 R17.1@35.458,52.984 R18.1@37.95,52.984 ; R18.1@38.43,52.984 R18.1@37.95,52.984 ; 20,45.161 20,47.65 ; 20,45.161 22.454,45.161 22.835,44.78 ; 20,47.65 20.192,47.458 C31.1@23.978,47.458 C32.1@25.375,47.458 26.371,47.458 26.518,47.604 26.518,50.241 25.649,51.11 ; 22.835,44.78 28.302,44.78 28.65,45.129 28.65,47.135 27.975,47.81 27.975,49.362 28.296,49.682 29.927,49.682 30.3,49.31 30.3,47.89 29.6,47.19 29.6,45.324 29.746,45.178 31.538,45.178 31.9,45.54 31.9,47.252 31.754,47.399 31.692,47.399 31.2,47.89 31.2,49.485 31.346,49.632 33.296,49.632 33.55,49.378 33.55,47.89 32.85,47.19 32.85,45.655 33.471,45.034 37.109,45.034 37.5,45.425 37.5,52.534 R18.1@37.95,52.984
  Top Layer w0.3: R49.1@1.013,21.209 1.013,22.609 0.508,23.114 0.508,39.392 0.654,39.539 R16.2@2.311,39.539
  Top Layer w0.4: U3.1@7.853,46.493 9.999,46.493 10.414,46.078 C142.2@10.414,45.858 12.537,45.858 C141.2@12.548,45.869 12.548,45.584 12.963,45.169 13.248,45.169 13.416,45 16.239,45 20,45
3.3V-2: BM3.34 BM4.13 BM4.19 BM4.33 C24.2 C25.1 C37.1 C44.2 C45.1 C46.1 C47.1 C48.1 C59.2 C60.2 C61.2 C62.2 C63.1 C64.1 C65.1 C66.1 C67.1 C68.2 C143.2 C144.2 C177.1 C178.1 C179.1 C183.1 R10.1 R11.1 R12.1 R17.2 R18.2 R19.1 R20.1 R42.1 R55.1 U4.1 U15.2 | length 233
  Top Layer w0.25: R12.1@12.5,72.5 R11.1@12.5,73.5 R10.1@12.5,74.5 ; C64.1@13.041,79.858 13.06,79.839 C37.1@13.06,76 13.06,75.98 12.5,75.42 R10.1@12.5,74.5 ; C45.1@14.681,64.806 C45.1@14.731,64.806 ; BM4.13@16.065,69.09 19.04,69.09 BM4.33@20,70.05 ; C24.2@16.94,59.5 20,59.5 ; BM3.34@20,56.75 20,59.5 ; C25.1@23.06,59.5 20,59.5 ; C178.1@25.578,70.519 25.586,70.527 26.763,70.527 C179.1@26.772,70.536 28.27,70.536 30.429,72.695 33.764,72.695 34.501,71.958 ; C178.1@25.586,70.536 25.038,70.536 24.892,70.389 24.892,68.859 24.643,68.61 BM4.19@23.935,68.61 21.44,68.61 BM4.33@20,70.05 ; C44.2@26.94,76 28.019,76 C67.1@29.279,77.26 ; C48.1@27.548,68.199 27.548,68.149 27.873,67.824 27.923,67.824 27.929,67.818 31.09,67.818 31.547,68.275 31.547,70.019 ; C67.1@29.489,77.1 30.389,77.1 32.41,79.121 37.369,79.121 37.578,78.912 37.578,77.279 38.505,76.352 40.374,76.352 40.828,76.806 40.828,77.356 40.974,77.502 42.437,77.502 42.462,77.477 42.54,77.477 42.73,77.287 42.73,75.367 42.54,75.177 40.376,75.177 40.184,75.369 38.616,75.369 38.278,75.031 38.278,73.215 38.424,73.069 40.455,73.069 40.728,73.342 40.728,74.037 40.918,74.227 42.715,74.227 42.875,74.066 42.875,72.048 42.729,71.902 40.45,71.902 40.184,72.168 38.36,72.168 37.948,71.756 37.948,69.996 37.801,69.85 35.605,69.85 35.458,69.996 35.458,71 34.501,71.958 ; U15.2@32.442,69.672 32.242,69.872 31.693,69.872 31.547,70.019 ; C177.1@34.56,68.326 34.56,71.898 ; R17.2@35.458,56.225 35.458,57.76 36.576,58.877 C143.2@36.576,61.011 C144.2@34.468,61.011 33.431,61.011 32.658,61.784 U4.1@31.958,61.784 24.068,61.784 23.876,61.976 C47.1@23.876,64.933 23.749,64.806 20,64.806 ; R10.1@12.5,74.5 7.292,74.5 R19.1@6.909,74.117 3.048,74.117 2.769,73.838 C68.2@2.769,70.991 2.769,66.294 2.5,66.025 2.5,63.032 3.353,62.179 6.921,62.179 7.15,62.408 7.15,64.135 6.96,64.325 6.793,64.325 6.45,64.668 6.45,66.31 6.79,66.65 8.46,66.65 8.8,66.31 8.8,64.832 8.451,64.484 8.449,64.484 8.1,64.135 8.1,62.665 8.408,62.357 10.279,62.357 10.425,62.503 10.425,64.11 9.7,64.835 9.7,66.424 9.846,66.571 11.814,66.571 12.05,66.334 12.05,64.89 11.35,64.19 11.35,62.634 11.678,62.306 14.58,62.306 15.149,62.876 15.149,64.338 15.056,64.431 15.056,64.481 C45.1@14.731,64.806 ; C45.1@14.731,64.806 C46.1@16.231,64.806 19.99,64.806 20,64.796 ; 20,59.5 20,64.796 ; 20,64.796 20,64.806 ; 20,64.806 BM4.33@20,70.05 ; 31.547,70.019 31.547,71.823 C183.1@31.631,71.907 34.45,71.907 34.501,71.958
  Top Layer w0.4: C59.2@28.804,56.225 C60.2@30.328,56.225 C61.2@31.801,56.225 C62.2@33.249,56.225 35.458,56.225 39.654,56.225 40.107,55.773 40.107,51.841 39.294,51.029 39.294,41.123 39.068,40.897 R42.1@39.068,34.62
3.3V-3: BM4.34 BM5.13 BM5.19 BM5.20 BM5.33 C40.2 C41.1 C64.2 C65.2 C66.2 C67.2 C68.1 C85.1 C86.1 C87.1 C88.1 C121.2 C145.2 C146.2 C156.1 C157.1 C158.1 C160.1 R19.2 R20.2 R33.1 R34.1 R43.1 R61.1 R108.1 R109.2 U5.1 U10.2 | length 209.9
  Top Layer w0.25: R20.2@9.83,77.267 9.83,80.62 11.074,81.864 13.741,81.864 14.391,81.215 C64.2@14.391,79.858 ; C65.2@14.391,78.435 C64.2@14.391,79.858 ; C40.2@16.94,77 20,77 ; BM4.34@20,74.25 20,77 ; C67.2@29.489,78.45 C66.2@28.092,78.45 23.637,78.45 23.063,77.876 23.063,77.003 C41.1@23.06,77 20,77 ; R33.1@50.444,70.003 R34.1@47.6,70.003 47.6,74.93 ; R109.2@53.467,74.524 48.006,74.524 47.6,74.93 ; BM5.20@56.065,73.41 BM5.33@59.04,73.41 ; BM5.19@56.065,73.89 58.56,73.89 BM5.33@59.04,73.41 ; 62.088,77.535 61.942,77.389 61.942,74.392 BM5.33@60.96,73.41 ; C158.1@66.218,73.601 66.198,73.601 66.007,73.41 BM5.13@63.935,73.41 BM5.33@60.96,73.41 ; C85.1@69.103,73.787 69.103,73.737 69.428,73.412 69.478,73.412 70.423,72.466 73.99,72.466 74.176,72.28 C160.1@74.176,71.577 74.176,71.038 74.03,70.891 72.822,70.891 72.568,70.637 72.568,69.266 ; C85.1@69.103,73.939 C85.1@69.128,73.965 ; U10.2@73.514,69.291 72.593,69.291 72.568,69.266 ; C121.2@77.699,65.534 C121.2@77.5,65.534 ; C64.2@14.391,79.858 21.525,79.858 21.811,79.571 ; 20,77 20,77.76 21.811,79.571 ; 21.811,79.571 38.227,79.571 ; 38.227,79.571 48.623,79.571 50.608,77.586 C88.1@54.712,77.586 C87.1@56.159,77.586 63.881,77.586 C86.1@63.932,77.535 64.257,77.86 64.983,77.86 65.216,78.094 U5.1@72.055,78.094 72.38,77.769 79.19,77.769 79.477,77.482 79.477,74.105 78.701,73.33 78.105,73.33 77.5,72.725 C121.2@77.5,65.534 ; 38.227,79.571 38.227,77.267 38.692,76.802 40.188,76.802 40.378,76.992 40.378,77.767 40.563,77.952 45.135,77.952 47.6,75.487 47.6,74.93 ; BM5.33@59.04,73.41 BM5.33@60,72.45 BM5.33@60.96,73.41 ; 72.568,69.266 72.568,67.208 72.72,67.056 73.474,67.056 73.474,66.033 73.62,65.886 74.436,65.886 R108.1@74.486,65.837 75.492,65.837 75.795,65.534 C121.2@77.5,65.534
  Top Layer w0.4: R43.1@1.369,53.924 1.369,56.562 0.508,57.423 0.508,76.302 1.473,77.267 R19.2@6.909,77.267 R20.2@9.83,77.267
3.3V-4: BM5.34 BM6.13 BM6.19 BM6.33 C72.2 C73.1 C77.1 C89.1 C90.1 C91.1 C92.1 C121.1 C122.1 C123.1 C124.1 C125.1 C126.2 C147.2 C148.2 C164.1 C165.1 C166.1 C168.1 R22.1 R24.1 R26.1 R33.2 R34.2 R35.1 R36.1 R44.1 R67.1 R110.2 U6.1 U12.2 | length 168
  Top Layer w0.25: R67.1@39.221,68.58 R44.1@39.221,66.378 ; C126.2@42.596,48.872 44.74,48.872 R110.2@45.758,47.854 45.811,47.907 45.811,49.299 C168.1@45.864,49.352 45.864,49.883 46.044,50.064 47.689,50.064 47.835,50.21 47.835,51.001 47.854,51.019 47.854,51.81 ; C164.1@45.695,54.449 47.685,54.449 C92.1@47.854,54.28 47.854,51.81 ; U6.1@45.716,61.05 41.961,61.05 40.321,61.05 39.221,62.151 R44.1@39.221,66.345 R44.1@39.221,66.378 ; U12.2@46.857,51.664 47.707,51.664 47.854,51.81 ; R33.2@50.444,66.853 R34.2@47.6,66.853 39.696,66.853 R44.1@39.221,66.378 ; C165.1@53.543,55.77 54.937,55.77 55.546,56.38 56.055,56.38 BM6.19@56.065,56.39 58.56,56.39 BM6.33@60,54.95 ; C73.1@56.94,65.5 60,65.5 ; BM5.34@60,68.25 60,65.5 ; C72.2@63.06,65.5 60,65.5 ; BM6.13@63.935,55.91 60.96,55.91 BM6.33@60,54.95 ; C77.1@66.94,49 66.987,49.047 66.987,49.067 67.5,49.58 R22.1@67.5,50.5 R24.1@67.5,51.5 R26.1@67.5,52.5 67.54,52.5 68.05,53.01 R36.1@69.469,53.01 R35.1@72.39,53.01 74.326,53.01 74.473,52.864 C122.1@74.473,51.119 C123.1@75.819,51.119 C124.1@77.14,51.119 C124.1@77.19,51.119 ; C121.1@77.5,59.475 77.5,62.175 76.784,62.89 73.203,62.89 72.825,62.513 72.825,60.754 73.55,60.029 73.55,58.69 73.28,58.42 71.45,58.42 71.2,58.67 71.2,59.948 71.215,59.962 71.215,60.021 71.405,60.212 71.464,60.212 71.9,60.648 71.9,62.484 71.595,62.789 69.774,62.789 69.575,62.59 69.575,60.835 69.59,60.82 69.59,60.752 69.78,60.562 69.848,60.562 70.3,60.11 70.3,58.547 70.122,58.369 70.082,58.369 70.074,58.362 68.155,58.362 67.965,58.552 67.965,60.021 68.123,60.179 68.123,60.3 68.385,60.562 68.449,60.562 68.64,60.752 68.64,60.816 68.675,60.852 68.675,62.719 68.123,63.271 66.269,63.271 65.405,62.408 C89.1@65.405,60.06 60.165,60.06 60,60.225 ; C121.1@77.699,59.484 77.699,51.628 C124.1@77.19,51.119 ; C125.1@78.461,51.119 C124.1@77.19,51.119 ; BM6.33@60,54.95 60,60.225 ; 60,60.225 60,65.5
  Top Layer w0.4: 41.961,61.05 42.114,60.897 42.114,57.568 42.583,57.099 44.099,57.099 44.48,57.48 47.619,57.48 47.854,57.246 C92.1@47.854,54.28 ; U6.1@45.716,61.05 53.91,61.05 54.886,60.075 C91.1@56.007,60.075 59.85,60.075 60,60.225
3.3V-5: BM6.34 BM7.13 BM7.19 BM7.20 BM7.33 C80.2 C81.1 C100.2 C109.1 C110.1 C111.1 C112.1 C122.2 C123.2 C124.2 C125.2 C126.1 C127.1 C128.1 C129.1 C130.1 C131.2 C149.2 C150.2 C172.1 C173.1 C174.1 C176.1 R35.2 R36.2 R37.1 R38.1 R45.1 R50.1 R112.1 U7.1 U14.2 | length 196
  Top Layer w0.25: C100.2@53.06,31.5 53.06,33.884 52.497,34.448 C130.1@51.765,34.448 C129.1@50.241,34.448 C128.1@48.717,34.448 C127.1@47.193,34.448 47.143,34.448 46.818,34.773 46.818,35.035 45.506,36.348 R37.1@44.831,36.348 R38.1@41.885,36.348 41.885,37.897 42.596,38.608 C126.1@42.596,42.822 42.596,44.577 43.18,45.161 46.323,45.161 47.15,44.335 47.15,42.865 46.475,42.19 46.475,40.387 46.621,40.241 48.502,40.241 48.775,40.513 48.775,42.135 48.111,42.799 48.111,42.855 48.075,42.89 48.075,44.31 48.927,45.161 50.165,45.161 50.425,44.901 50.425,42.89 49.725,42.19 49.725,40.253 49.871,40.106 51.689,40.106 52.05,40.468 52.05,42.11 51.35,42.81 51.35,44.797 51.613,45.06 54.839,45.06 54.915,44.983 C112.1@54.915,42.509 C111.1@56.49,42.509 59.665,42.509 ; BM7.20@56.065,38.41 BM7.33@59.04,38.41 ; BM7.19@56.065,38.89 58.56,38.89 BM7.33@59.04,38.41 ; C81.1@56.94,48 59.665,48 ; BM6.34@60,50.75 59.665,50.415 59.665,48 ; C80.2@63.06,48 59.665,48 ; C174.1@66.675,38.633 66.655,38.633 66.432,38.41 BM7.13@63.935,38.41 60.96,38.41 BM7.33@60,37.45 BM7.33@59.665,37.785 ; R36.2@69.5,49.86 R35.2@72.39,49.86 78.551,49.86 78.637,49.946 78.713,49.87 79.219,49.87 79.575,50.225 79.575,66.678 79.091,67.162 79.091,68.13 78.616,68.605 R45.1@78.616,70.79 ; C172.1@73.279,32.283 73.279,33.051 72.923,33.407 72.923,34.767 ; U14.2@73.895,34.62 73.07,34.62 72.923,34.767 ; C176.1@73.924,37.108 73.849,37.033 73.849,36.406 73.777,36.335 73.108,36.335 72.923,36.15 72.923,34.767 ; C131.2@77.5,28.025 77.5,29.942 77.5,37.419 79.075,38.994 79.164,38.994 79.575,39.406 79.575,43.545 79.429,43.691 72.222,43.691 U7.1@72.055,43.524 66.003,43.524 64.988,42.509 C110.1@63.602,42.509 59.665,42.509 ; BM7.33@59.04,38.41 BM7.33@59.665,37.785 ; BM7.33@59.665,37.785 59.665,42.509 ; 59.665,42.509 59.665,48
  Top Layer w0.4: C80.2@63.06,48 63.06,46.871 63.475,46.457 68.504,46.457 69.875,47.828 69.875,49.485 69.5,49.86 R36.2@69.469,49.86 ; C109.1@69.458,39.141 69.708,38.891 69.708,38.436 70.416,37.728 73.789,37.728 73.924,37.593 C176.1@73.924,37.108 ; C172.1@73.279,32.283 73.379,32.183 73.379,31.878 74.599,30.658 76.784,30.658 77.5,29.942